# Altium PCB Pressure_Tap_Board.PcbDoc (part 1 of 2)
Units mil, origin at the board's own origin, x right, y up, seen from the top; angles counter-clockwise.
Board outline 8600 x 2865 mil, 2 copper layers (Top Layer, Bottom Layer); 161 components, 82 nets, 571 pads, 255 vias.
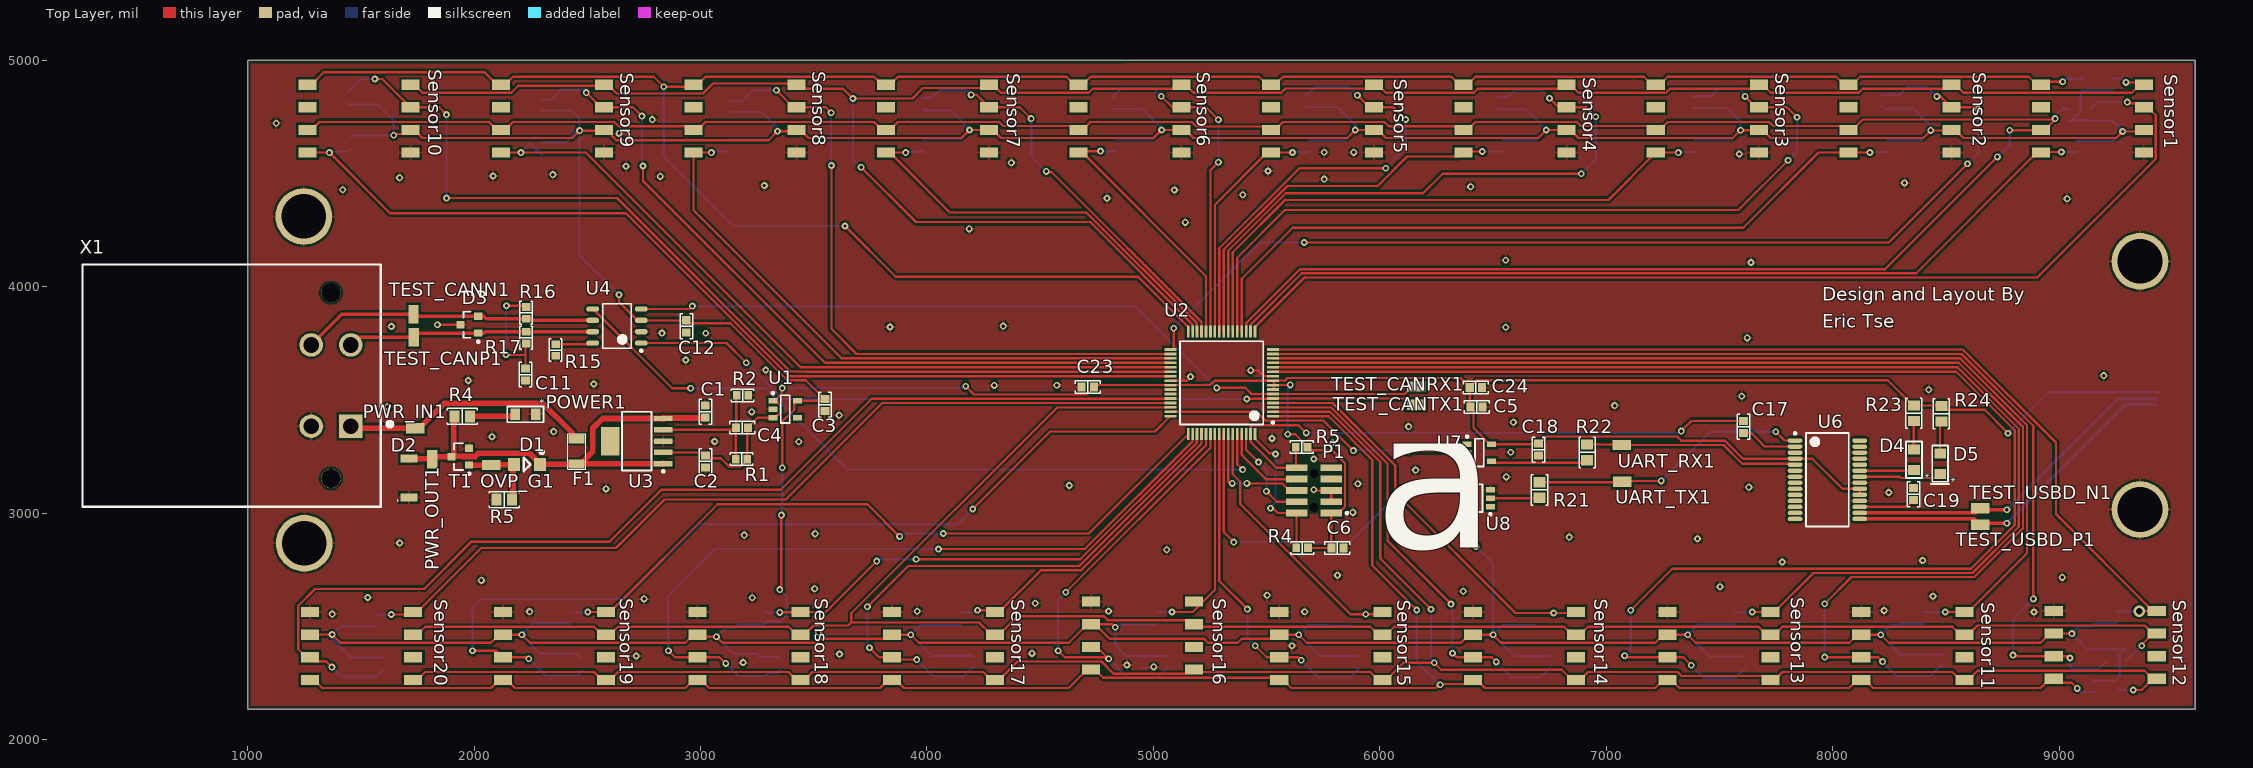
[diagram p0: Top Layer view]
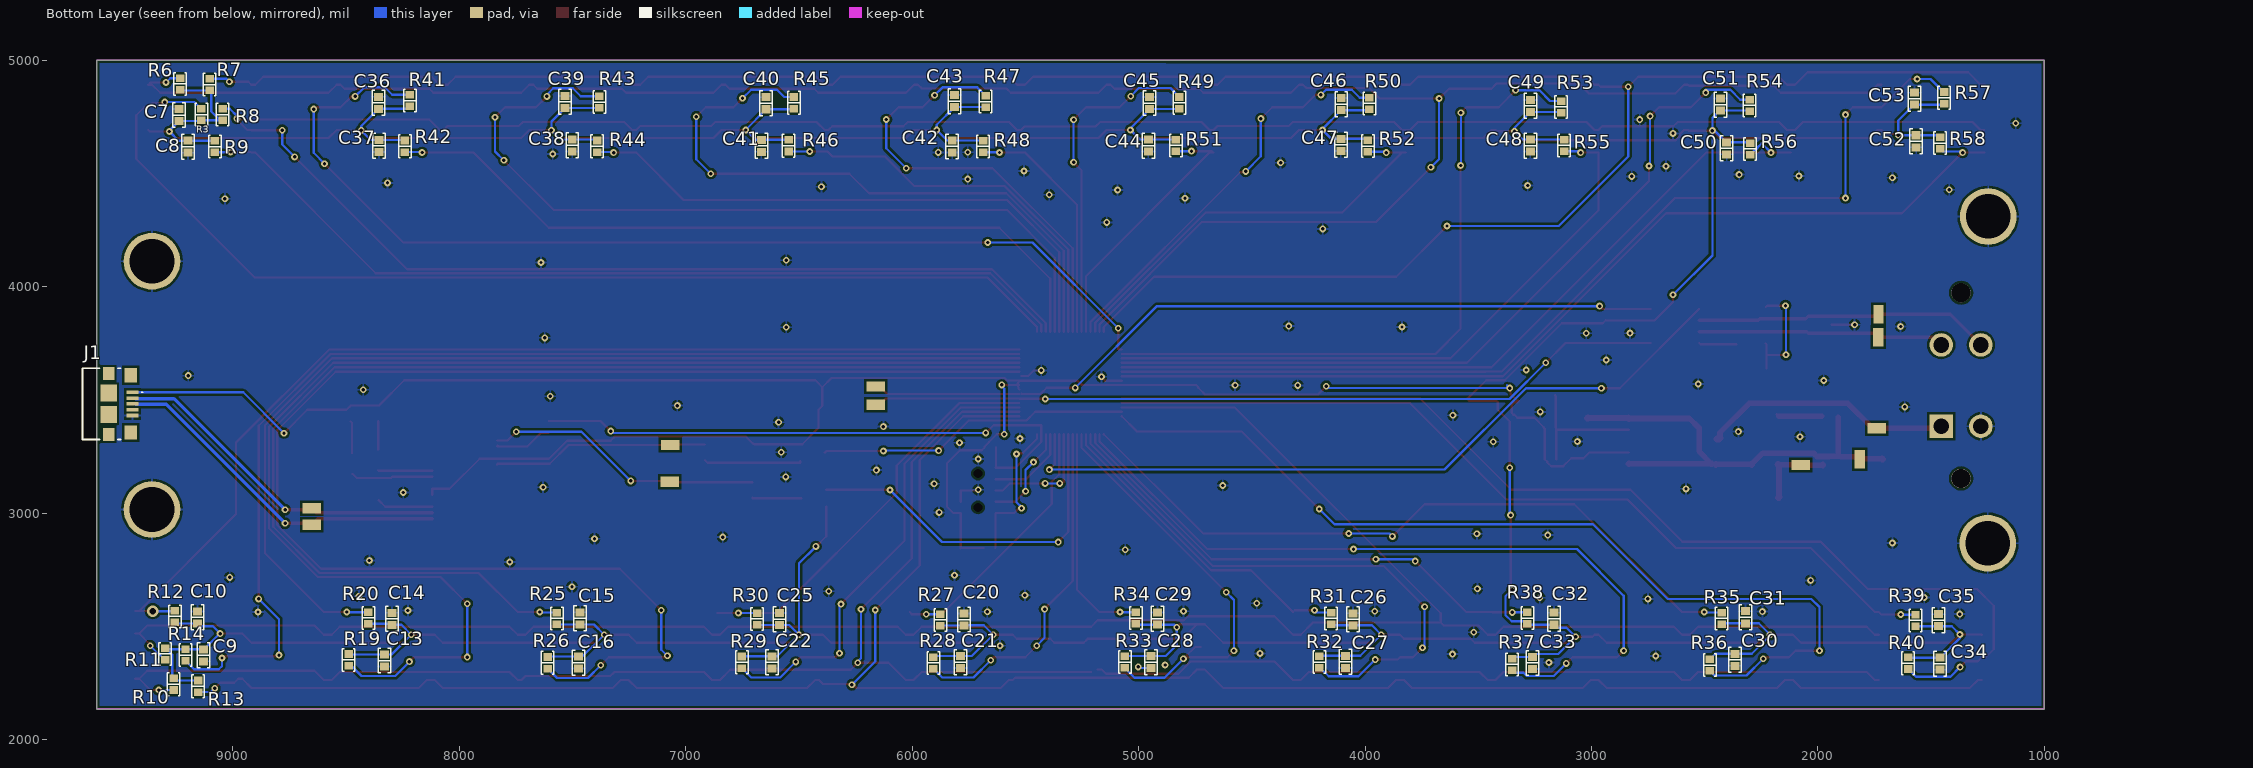
[diagram p1: Bottom Layer view, seen from below]
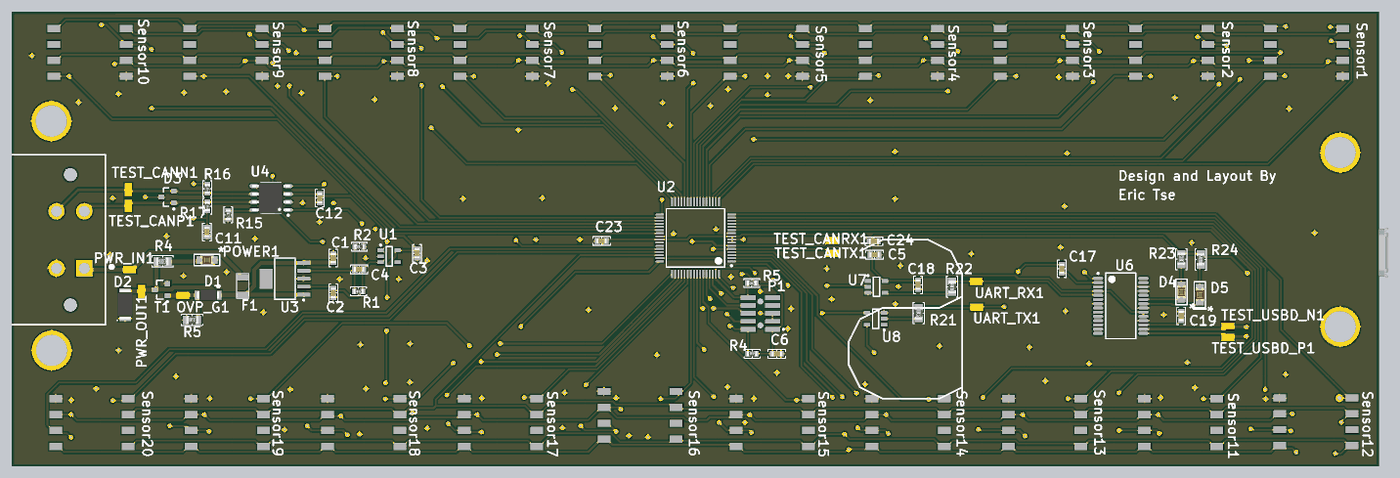
[diagram p3: 3D render of the assembled board from above, using the file's embedded part models]
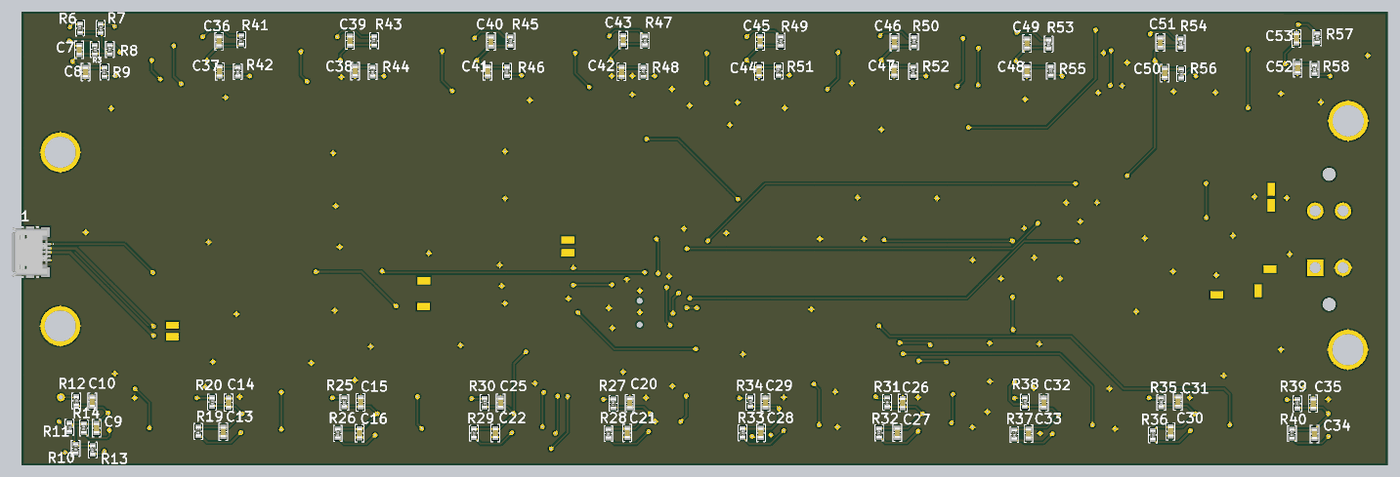
[diagram p4: 3D render of the assembled board from below, using the file's embedded part models]

## Layer stack, top to bottom
Top Solder: solder mask 0.4, Solder Resist, Dk 3.5
Top Layer: signal copper 1.4
Dielectric 1: dielectric 12.6, FR-4, Dk 4.8
Bottom Layer: signal copper 1.4
Bottom Solder: solder mask 0.4, Solder Resist, Dk 3.5

## Board outline
1000,2135 9600,2135 9600,5000 1000,5000

## Design rules (kind name [scope] priority, off if disabled: settings)
BoardOutlineClearance [All] p1: gap=10 ignorepadtopadclearanceinfootprint=FALSE
Clearance [All] p1: gap=10 ignorepadtopadclearanceinfootprint=FALSE except(8: Arc-Arc Arc-Track Arc-SMDPad Arc-Hole Track-Track Track-SMDPad Track-Hole SMDPad-SMDPad SMDPad-Hole THPad-Hole Via-Hole Fill-Hole Poly-Hole Region-Hole Text-Hole)
DiffPairsRouting [All] p1: maxlimit=20 minlimit=10 mostfreqgap=10 toplayer_minwidth=15 toplayer_maxwidth=15 toplayer_prefwidth=15 bottomlayer_minwidth=15 bottomlayer_maxwidth=15 bottomlayer_prefwidth=15 maxuncoupledlength=500
MatchedLengths "Schematic Matched Net Lengths" [InNet('D_N')] p1: tolerance=10 checknetsindiffpair=FALSE checkdiffpairvsdiffpair=TRUE checkxsignals=TRUE checkothers=TRUE
PolygonConnect [All] p1: connectstyle=Relief reliefconductorwidth=10 reliefentries=4 polygonreliefangle="90 Angle" airgapwidth=10
RoomDefinition U_USB [InComponentClass('U_USB')] p1: confinementstyle=ConfineIn formatcopy=TRUE lockcomponents=FALSE outline 0,0 2000,0 2000,1000 0,1000
RoomDefinition U_Sensors11-20 [InComponentClass('U_Sensors11-20')] p2: confinementstyle=ConfineIn formatcopy=TRUE lockcomponents=FALSE outline 0,0 2000,0 2000,1000 0,1000
RoomDefinition U_Sensors1-10 [InComponentClass('U_Sensors1-10')] p3: confinementstyle=ConfineIn formatcopy=TRUE lockcomponents=FALSE outline 0,0 2000,0 2000,1000 0,1000
RoomDefinition U_RVP_OVP_LC [InComponentClass('U_RVP_OVP_LC')] p4: confinementstyle=ConfineIn formatcopy=TRUE lockcomponents=FALSE outline 0,0 2000,0 2000,1000 0,1000
RoomDefinition "U_Power circuit" [InComponentClass('U_Power circuit')] p5: confinementstyle=ConfineIn formatcopy=TRUE lockcomponents=FALSE outline 0,0 2000,0 2000,1000 0,1000
RoomDefinition U_MCU_MKE185F512VLH16 [InComponentClass('U_MCU_MKE185F512VLH16')] p6: confinementstyle=ConfineIn formatcopy=TRUE lockcomponents=FALSE outline 0,0 2000,0 2000,1000 0,1000
RoomDefinition U_1 [InComponentClass('U_3')] p7: confinementstyle=ConfineIn formatcopy=TRUE lockcomponents=FALSE outline 0,0 2000,0 2000,1000 0,1000
RoomDefinition U_3 [InComponentClass('U_3')] p8: confinementstyle=ConfineIn formatcopy=TRUE lockcomponents=FALSE outline 0,0 2000,0 2000,1000 0,1000
RoomDefinition AeroPressureSensor [InComponentClass('AeroPressureSensor')] p9: confinementstyle=ConfineIn formatcopy=TRUE lockcomponents=FALSE outline 0,0 2000,0 2000,1000 0,1000
RoutingVias [All] p1: holewidth=28 width=50 viastyle="Through Hole" minholewidth=28 minwidth=50 maxholewidth=28 maxwidth=50
SolderMaskExpansion [All] p1: expansion=4
Width [All] p1: maxlimit=50 minlimit=10 preferedwidth=10 checkconnectedcopper=TRUE
29 further rules are at their usual default settings.

## Classes and differential pairs
component class U_USB: C17 C18 C19 D4 D5 J1 R21 R22 R23 R24 TEST_USBD_N1 TEST_USBD_P1 U6 UART_RX1 UART_TX1
component class U_Sensors11-20: C9 C10 C13 C14 C15 C16 C20 C21 C22 C25 C26 C27 C28 C29 C30 C31 C32 C33 C34 C35 R10 R11 R12 R13 R14 R19 R20 R25 R26 R27 R28 R29 R30 R31 R32 R33 R34 R35 R36 R37 R38 R39 R40 Sensor11 Sensor12 Sensor13 Sensor14 Sensor15 Sensor16 Sensor17 Sensor18 Sensor19 Sensor20
component class U_Sensors1-10: C7 C8 C36 C37 C38 C39 C40 C41 C42 C43 C44 C45 C46 C47 C48 C49 C50 C51 C52 C53 l R3 R6 R7 R8 R9 R41 R42 R43 R44 R45 R46 R47 R48 R49 R50 R51 R52 R53 R54 R55 R56 R57 R58 Sensor1 Sensor2 Sensor3 Sensor4 Sensor5 Sensor6 Sensor7 Sensor8 Sensor9 Sensor10
component class U_RVP_OVP_LC: D1 D2 OVP_G1 POWER1 PWR_IN1 PWR_OUT1 R4 R5 T1
component class "U_Power circuit": C1 C2 C3 C4 R1 R2 U1 U3
component class U_MCU_MKE185F512VLH16: C5 C6 C23 C24 P1 R4 R5 TEST_CANRX1 TEST_CANTX1 U2
component class U_3: C11 C12 D3 R15 R16 R17 TEST_CANN1 TEST_CANP1 U4
component class AeroPressureSensor: F1 X1
differential pair CAN: +CAN_P -CAN_N
differential pair D: +D_P -D_N

## Components (designator, comment, footprint, x,y, rotation, side; value= is the part's Value field where it differs from the comment)
C1 "Capacitor MLCC 0.10uf 16V CAP 0603/1608" "CAP 0603/1608" 3021,3449 r270 top value=0.10uf
C2 "Capacitor MLCC 1.0uf 16V CAP 0603/1608" "CAP 0603/1608" 3022,3229.57 r90 top value=1.0uf
C3 "Capacitor MLCC 1.0uf 16V CAP 0603/1608" "CAP 0603/1608" 3549,3479 r90 top value=1.0uf
C4 "Capacitor MLCC 0.010uf 16V CAP 0603/1608" "CAP 0603/1608" 3184,3378 r0 top value=0.010uf
C5 "Capacitor MLCC 0.10uf 25V CAP 0603/1608" "CAP 0603/1608" 6427.43,3470 r180 top value=0.10uf
C6 "Capacitor MLCC 0.10uf 16V CAP 0603/1608" "CAP 0603/1608" 5812.35,2846.23 r180 top value=0.10uf
C7 "Capacitor MLCC 0.10uf 16V CAP 0603/1608" "CAP 0603/1608" 9238,4759 r270 bottom value=0.10uf
C8 "Capacitor MLCC 10uf 16V CAP 0603/1608" "CAP 0603/1608" 9198,4619 r90 bottom value=10uf
C9 "Capacitor MLCC 0.10uf 16V CAP 0603/1608" "CAP 0603/1608" 9129,2373 r90 bottom value=0.10uf
C10 "Capacitor MLCC 10uf 16V CAP 0603/1608" "CAP 0603/1608" 9156,2540 r270 bottom value=10uf
C11 "Capacitor MLCC 4700pf 50V CAP 0603/1608" "CAP 0603/1608" 2227,3613 r90 top value=4700pf
C12 "Capacitor MLCC 0.10uf 50V CAP 0603/1608" "CAP 0603/1608" 2937,3826 r270 top value=0.10uf
C13 "Capacitor MLCC 10uf 16V CAP 0603/1608" "CAP 0603/1608" 8331,2350 r90 bottom value=10uf
C14 "Capacitor MLCC 0.10uf 16V CAP 0603/1608" "CAP 0603/1608" 8297,2534 r270 bottom value=0.10uf
C15 "Capacitor MLCC 0.10uf 16V CAP 0603/1608" "CAP 0603/1608" 7466,2536 r270 bottom value=0.10uf
C16 "Capacitor MLCC 10uf 16V CAP 0603/1608" "CAP 0603/1608" 7473,2341 r90 bottom value=10uf
C17 "Capacitor MLCC 0.10uf 25V CAP 0603/1608" "CAP 0603/1608" 7606,3381.57 r90 top value=0.10uf
C18 "Capacitor MLCC 0.10uf 25V CAP 0603/1608" "CAP 0603/1608" 6701,3281 r90 top value=0.10uf
C19 "Capacitor MLCC 0.10uf 25V CAP 0603/1608" "CAP 0603/1608" 8357,3085 r270 top value=0.10uf
C20 "Capacitor MLCC 0.10uf 16V CAP 0603/1608" "CAP 0603/1608" 5771,2531 r270 bottom value=0.10uf
C21 "Capacitor MLCC 10uf 16V CAP 0603/1608" "CAP 0603/1608" 5787,2343 r90 bottom value=10uf
C22 "Capacitor MLCC 0.10uf 16V CAP 0603/1608" "CAP 0603/1608" 6618,2342 r90 bottom value=0.10uf
C23 "Capacitor MLCC 100pf 25V CAP 0603/1608" "CAP 0603/1608" 4710,3557 r0 top value=100pf
C24 "Capacitor MLCC 0.10uf 25V CAP 0603/1608" "CAP 0603/1608" 6423.57,3555 r180 top value=0.10uf
C25 "Capacitor MLCC 10uf 16V CAP 0603/1608" "CAP 0603/1608" 6585,2533 r270 bottom value=10uf
C26 "Capacitor MLCC 0.10uf 16V CAP 0603/1608" "CAP 0603/1608" 4053,2532 r270 bottom value=0.10uf
C27 "Capacitor MLCC 10uf 16V CAP 0603/1608" "CAP 0603/1608" 4087,2344 r90 bottom value=10uf
C28 "Capacitor MLCC 0.10uf 16V CAP 0603/1608" "CAP 0603/1608" 4946,2343 r90 bottom value=0.10uf
C29 "Capacitor MLCC 10uf 16V CAP 0603/1608" "CAP 0603/1608" 4917,2535 r270 bottom value=10uf
C30 "Capacitor MLCC 0.10uf 16V CAP 0603/1608" "CAP 0603/1608" 2366,2353 r90 bottom value=0.10uf
C31 "Capacitor MLCC 10uf 16V CAP 0603/1608" "CAP 0603/1608" 2320,2541 r270 bottom value=10uf
C32 "Capacitor MLCC 10uf 16V CAP 0603/1608" "CAP 0603/1608" 3165,2534.43 r270 bottom value=10uf
C33 "Capacitor MLCC 0.10uf 16V CAP 0603/1608" "CAP 0603/1608" 3261,2339 r90 bottom value=0.10uf
C34 "Capacitor MLCC 0.10uf 16V CAP 0603/1608" "CAP 0603/1608" 1460,2336 r90 bottom value=0.10uf
C35 "Capacitor MLCC 10uf 16V CAP 0603/1608" "CAP 0603/1608" 1468,2528 r270 bottom value=10uf
C36 "Capacitor MLCC 0.10uf 16V CAP 0603/1608" "CAP 0603/1608" 8357,4813 r270 bottom value=0.10uf
C37 "Capacitor MLCC 10uf 16V CAP 0603/1608" "CAP 0603/1608" 8354,4622.43 r90 bottom value=10uf
C38 "Capacitor MLCC 0.10uf 16V CAP 0603/1608" "CAP 0603/1608" 7501,4624.43 r90 bottom value=0.10uf
C39 "Capacitor MLCC 10uf 16V CAP 0603/1608" "CAP 0603/1608" 7533,4816.57 r270 bottom value=10uf
C40 "Capacitor MLCC 0.10uf 16V CAP 0603/1608" "CAP 0603/1608" 6645,4811 r270 bottom value=0.10uf
C41 "Capacitor MLCC 10uf 16V CAP 0603/1608" "CAP 0603/1608" 6666,4623 r90 bottom value=10uf
C42 "Capacitor MLCC 0.10uf 16V CAP 0603/1608" "CAP 0603/1608" 5823,4620 r90 bottom value=0.10uf
C43 "Capacitor MLCC 10uf 16V CAP 0603/1608" "CAP 0603/1608" 5813,4820.59 r270 bottom value=10uf
C44 "Capacitor MLCC 0.10uf 16V CAP 0603/1608" "CAP 0603/1608" 4957,4624 r90 bottom value=0.10uf
C45 "Capacitor MLCC 10uf 16V CAP 0603/1608" "CAP 0603/1608" 4951,4812 r270 bottom value=10uf
C46 "Capacitor MLCC 0.10uf 16V CAP 0603/1608" "CAP 0603/1608" 4105,4807 r270 bottom value=0.10uf
C47 "Capacitor MLCC 10uf 16V CAP 0603/1608" "CAP 0603/1608" 4107,4627 r90 bottom value=10uf
C48 "Capacitor MLCC 0.10uf 16V CAP 0603/1608" "CAP 0603/1608" 3270,4624 r90 bottom value=0.10uf
C49 "Capacitor MLCC 10uf 16V CAP 0603/1608" "CAP 0603/1608" 3270,4799 r270 bottom value=10uf
C50 "Capacitor MLCC 0.10uf 16V CAP 0603/1608" "CAP 0603/1608" 2403,4612 r90 bottom value=0.10uf
C51 "Capacitor MLCC 10uf 16V CAP 0603/1608" "CAP 0603/1608" 2431,4805 r270 bottom value=10uf
C52 "Capacitor MLCC 0.10uf 16V CAP 0603/1608" "CAP 0603/1608" 1566,4643 r90 bottom value=0.10uf
C53 "Capacitor MLCC 10uf 16V CAP 0603/1608" "CAP 0603/1608" 1574,4831 r270 bottom value=10uf
D1 "DDZ9701-7" SOD123F 2234,3216 r0 top value=14Vz
D2 "DIODE" SOD-128 1712,3156 r90 top value=5A
D3 "NUP1105LT1G" "SOT-23 (TO-236)" 1979,3833 r180 top value=TVS_24V
D4 "" 0805_LED 8359,3236 r270 top value=Green
D5 "" 0805_LED 8474,3219 r270 top value=Red
F1 "2.2A" "PTC Fuse 1206/3216" 2453,3273 r90 top
J1 "1981568-1" TECO-1981568-5_V 9442.68,3483.24 r270 bottom value=CONN
OVP_G1 "RCU-0C" RCU-0C 2076,3213 r90 top
P1 "5103309-1" HDR2X5_SMT 5709,3101 r90 top value=CONN
POWER1 "LED" 0805_LED 2227,3437 r0 top value=Green
PWR_IN1 "RCU-0C" RCU-0C 1740.6,3376 r90 top
PWR_OUT1 "RCU-0C" RCU-0C 1815,3239 r180 top
R1 "Resistor 43k 0603 1/10W 1%" "RES 0603/1608" 3181,3239 r0 top value=43k
R2 "Resistor 15k 0603 1/10W 1%" "RES 0603/1608" 3186,3521 r180 top value=15k
R3 "Resistor 1.0k 0603 1/10W 5%" "RES 0603/1608" 9139,4761 r270 bottom value=1.0k
R4 "Resistor 470 0805 1/10W 1%" "RES 0805/2012" 1948,3428 r180 top value=470
R4 "Resistor 10k 0603 1/10W 1%" "RES 0603/1608" 5657,2847 r0 top value=10k
R5 "Resistor 47k 0805 1/10W 1%" "RES 0805/2012" 2133,3060 r0 top value=47k
R5 "Resistor 10k 0603 1/10W 5%" "RES 0603/1608" 5655,3292 r0 top value=10k
R6 "Resistor 1.0k 0603 1/10W 5%" "RES 0603/1608" 9233,4896 r270 bottom value=1.0k
R7 "Resistor 1.0k 0603 1/10W 5%" "RES 0603/1608" 9102,4893 r270 bottom value=1.0k
R8 "Resistor 1.0k 0603 1/10W 5%" "RES 0603/1608" 9045,4761 r270 bottom value=1.0k
R9 "Resistor 1.0k 0603 1/10W 5%" "RES 0603/1608" 9079,4619.59 r90 bottom value=1.0k
R10 "Resistor 1.0k 0603 1/10W 5%" "RES 0603/1608" 9261,2245.41 r90 bottom value=1.0k
R11 "Resistor 1.0k 0603 1/10W 5%" "RES 0603/1608" 9299,2379 r90 bottom value=1.0k
R12 "Resistor 1.0k 0603 1/10W 5%" "RES 0603/1608" 9256,2545 r270 bottom value=1.0k
R13 "Resistor 1.0k 0603 1/10W 5%" "RES 0603/1608" 9153,2236 r90 bottom value=1.0k
R14 "Resistor 1.0k 0603 1/10W 5%" "RES 0603/1608" 9209,2374 r90 bottom value=1.0k
R15 "Resistor 1.0k 0603 1/10W 1%" "RES 0603/1608" 2360,3721 r270 top value=1.0k
R16 "Resistor 62 0603 1/10W 5%" "RES 0603/1608" 2230,3885.59 r90 top value=62
R17 "Resistor 62 0603 1/10W 5%" "RES 0603/1608" 2230,3775.41 r90 top value=62
R19 "Resistor 1.0k 0603 1/10W 5%" "RES 0603/1608" 8489,2353 r90 bottom value=1.0k
R20 "Resistor 1.0k 0603 1/10W 5%" "RES 0603/1608" 8401,2538 r270 bottom value=1.0k
R21 "Resistor 1.0k 0805 1/4W 1%" "RES 0805/2012" 6705,3103 r270 top value=1.0k
R22 "Resistor 1.0k 0805 1/4W 1%" "RES 0805/2012" 6915,3269 r270 top value=1.0k
R23 "Resistor 1.0k 0805 1/4W 1%" "RES 0805/2012" 8358,3442 r90 top value=1.0k
R24 "Resistor 1.0k 0805 1/4W 1%" "RES 0805/2012" 8480,3440 r90 top value=1.0k
R25 "Resistor 1.0k 0603 1/10W 5%" "RES 0603/1608" 7569,2536 r270 bottom value=1.0k
R26 "Resistor 1.0k 0603 1/10W 5%" "RES 0603/1608" 7610,2340 r90 bottom value=1.0k
R27 "Resistor 1.0k 0603 1/10W 5%" "RES 0603/1608" 5875,2529 r270 bottom value=1.0k
R28 "Resistor 1.0k 0603 1/10W 5%" "RES 0603/1608" 5906,2339 r90 bottom value=1.0k
R29 "Resistor 1.0k 0603 1/10W 5%" "RES 0603/1608" 6752,2342 r90 bottom value=1.0k
R30 "Resistor 1.0k 0603 1/10W 5%" "RES 0603/1608" 6685,2534 r270 bottom value=1.0k
R31 "Resistor 1.0k 0603 1/10W 5%" "RES 0603/1608" 4150,2536 r270 bottom value=1.0k
R32 "Resistor 1.0k 0603 1/10W 5%" "RES 0603/1608" 4202,2343 r90 bottom value=1.0k
R33 "Resistor 1.0k 0603 1/10W 5%" "RES 0603/1608" 5061,2343 r90 bottom value=1.0k
R34 "Resistor 1.0k 0603 1/10W 5%" "RES 0603/1608" 5012,2537 r270 bottom value=1.0k
R35 "Resistor 1.0k 0603 1/10W 5%" "RES 0603/1608" 2425,2536 r270 bottom value=1.0k
R36 "Resistor 1.0k 0603 1/10W 5%" "RES 0603/1608" 2477,2330 r90 bottom value=1.0k
R37 "Resistor 1.0k 0603 1/10W 5%" "RES 0603/1608" 3350,2333 r90 bottom value=1.0k
R38 "Resistor 1.0k 0603 1/10W 5%" "RES 0603/1608" 3283,2537 r270 bottom value=1.0k
R39 "Resistor 1.0k 0603 1/10W 5%" "RES 0603/1608" 1569,2527 r270 bottom value=1.0k
R40 "Resistor 1.0k 0603 1/10W 5%" "RES 0603/1608" 1602,2338 r90 bottom value=1.0k
R41 "Resistor 1.0k 0603 1/10W 5%" "RES 0603/1608" 8218,4823 r270 bottom value=1.0k
R42 "Resistor 1.0k 0603 1/10W 5%" "RES 0603/1608" 8240,4621 r90 bottom value=1.0k
R43 "Resistor 1.0k 0603 1/10W 5%" "RES 0603/1608" 7381,4816 r270 bottom value=1.0k
R44 "Resistor 1.0k 0603 1/10W 5%" "RES 0603/1608" 7391,4621 r90 bottom value=1.0k
R45 "Resistor 1.0k 0603 1/10W 5%" "RES 0603/1608" 6522,4813 r270 bottom value=1.0k
R46 "Resistor 1.0k 0603 1/10W 5%" "RES 0603/1608" 6545,4623.41 r90 bottom value=1.0k
R47 "Resistor 1.0k 0603 1/10W 5%" "RES 0603/1608" 5675,4818 r270 bottom value=1.0k
R48 "Resistor 1.0k 0603 1/10W 5%" "RES 0603/1608" 5687,4620.41 r90 bottom value=1.0k
R49 "Resistor 1.0k 0603 1/10W 5%" "RES 0603/1608" 4820,4813 r270 bottom value=1.0k
R50 "Resistor 1.0k 0603 1/10W 5%" "RES 0603/1608" 3981,4810 r270 bottom value=1.0k
R51 "Resistor 1.0k 0603 1/10W 5%" "RES 0603/1608" 4835,4625 r90 bottom value=1.0k
R52 "Resistor 1.0k 0603 1/10W 5%" "RES 0603/1608" 3987,4622 r90 bottom value=1.0k
R53 "Resistor 1.0k 0603 1/10W 5%" "RES 0603/1608" 3134,4795 r270 bottom value=1.0k
R54 "Resistor 1.0k 0603 1/10W 5%" "RES 0603/1608" 2302,4801 r270 bottom value=1.0k
R55 "Resistor 1.0k 0603 1/10W 5%" "RES 0603/1608" 3121,4625 r90 bottom value=1.0k
R56 "Resistor 1.0k 0603 1/10W 5%" "RES 0603/1608" 2299,4609 r90 bottom value=1.0k
R57 "Resistor 1.0k 0603 1/10W 5%" "RES 0603/1608" 1443,4835 r270 bottom value=1.0k
R58 "Resistor 1.0k 0603 1/10W 5%" "RES 0603/1608" 1460,4635 r90 bottom value=1.0k
Sensor1 "for Aero Pressure Sensor Board" "RSCMJJM005NDSE3 Pressure Sensor" 8923.92,4793 r270 top
Sensor2 "for Aero Pressure Sensor Board" "RSCMJJM005NDSE3 Pressure Sensor" 8073.92,4793 r270 top
Sensor3 "for Aero Pressure Sensor Board" "RSCMJJM005NDSE3 Pressure Sensor" 7223.45,4793 r270 top
Sensor4 "for Aero Pressure Sensor Board" "RSCMJJM005NDSE3 Pressure Sensor" 6373.92,4793 r270 top
Sensor5 "for Aero Pressure Sensor Board" "RSCMJJM005NDSE3 Pressure Sensor" 5523.92,4793 r270 top
Sensor6 "for Aero Pressure Sensor Board" "RSCMJJM005NDSE3 Pressure Sensor" 4673.92,4793 r270 top
Sensor7 "for Aero Pressure Sensor Board" "RSCMJJM005NDSE3 Pressure Sensor" 3823.92,4793 r270 top
Sensor8 "for Aero Pressure Sensor Board" "RSCMJJM005NDSE3 Pressure Sensor" 2973.92,4793 r270 top
Sensor9 "for Aero Pressure Sensor Board" "RSCMJJM005NDSE3 Pressure Sensor" 2123.92,4793 r270 top
Sensor10 "for Aero Pressure Sensor Board" "RSCMJJM005NDSE3 Pressure Sensor" 1268.92,4793 r270 top
Sensor11 "for Aero Pressure Sensor Board" "RSCMJJM005NDSE3 Pressure Sensor" 8576.08,2364 r90 top
Sensor12 "for Aero Pressure Sensor Board" "RSCMJJM005NDSE3 Pressure Sensor" 9426.08,2369 r90 top
Sensor13 "for Aero Pressure Sensor Board" "RSCMJJM005NDSE3 Pressure Sensor" 7719.68,2364 r90 top
Sensor14 "for Aero Pressure Sensor Board" "RSCMJJM005NDSE3 Pressure Sensor" 6861,2364 r90 top
Sensor15 "for Aero Pressure Sensor Board" "RSCMJJM005NDSE3 Pressure Sensor" 6006,2364 r90 top
Sensor16 "for Aero Pressure Sensor Board" "RSCMJJM005NDSE3 Pressure Sensor" 5175,2410 r90 top
Sensor17 "for Aero Pressure Sensor Board" "RSCMJJM005NDSE3 Pressure Sensor" 4296,2364 r90 top
Sensor18 "for Aero Pressure Sensor Board" "RSCMJJM005NDSE3 Pressure Sensor" 3436,2364 r90 top
Sensor19 "for Aero Pressure Sensor Board" "RSCMJJM005NDSE3 Pressure Sensor" 2577.57,2364 r90 top
Sensor20 "for Aero Pressure Sensor Board" "RSCMJJM005NDSE3 Pressure Sensor" 1726,2364 r90 top
T1 "DMG2302UK-7" SOT23-3 1939,3250 r180 top value=N_Channel
TEST_CANN1 "RCU-0C" RCU-0C 1732,3879 r0 top
TEST_CANP1 "RCU-0C" RCU-0C 1733,3778 r180 top
TEST_CANRX1 "RCU-0C" RCU-0C 6161,3560 r90 top
TEST_CANTX1 "RCU-0C" RCU-0C 6161,3479 r90 top
TEST_USBD_N1 "RCU-0C" RCU-0C 8651,3022 r90 top
TEST_USBD_P1 "RCU-0C" RCU-0C 8651,2950 r90 top
U1 "LP5907-3.3 V LDO" SOT23-5 3374,3460 r0 top value="3.3 V"
U2 "" TQFP64 5301,3576 r180 top
U3 "LDO-5Pin" SOT223-5 2718,3319 r180 top value="5.5V 1A"
U4 "SN65HVD233 3.3V CAN Bus Transceivers" SOIC-8 2631,3827 r180 top value="CAN to UART"
U6 "FT232RL" SSOP-28 7976.28,3148.31 r0 top
U7 "SN74LV1T34 Logic Level Shifter" SOT23-5 6439.5,3268.07 r0 top value=N/A
U8 "SN74LV1T34 Logic Level Shifter" SOT23-5 6434,3067 r180 top value=N/A
UART_RX1 "RCU-0C" RCU-0C 7068,3302 r90 top
UART_TX1 "RCU-0C" RCU-0C 7071,3139 r90 top
X1 "DTF13-4P" DTF13-4P 1368,3563.96 r270 top value=CONN

## Footprints (in the part's own frame and the unit in brackets; to place one, negate y for a bottom-side part, rotate by r counter-clockwise, add the part's x,y. Pads: shape width x height; smd on the part's side, far side on the other; paste and mask are expansions set on the pad)
0805_LED [mm]
  rect 1.1x1.3 smd: 1(-1.15,0) 2(1.15,0)
  silkscreen extent -2.06,-0.89 2.03,0.89, body extent -1.05,-0.67 1.05,0.68, height 0.9
"CAP 0603/1608" [mm] "Chip Capacitor, 2-Leads, Body 1.60x0.80mm, IPC Medium Density"
  rect 0.9x1 smd: 1(-0.675,0) 2(0.675,0)
  silkscreen extent -1.4,-0.7 1.4,0.7, body extent -0.8,-0.41 0.8,0.41, height 0.82
DTF13-4P [mm]
  rect 2.64x2.64 hole 1.76: 1(4.561,2.223)
  round 2.64 hole 1.76: 2(4.561,-2.227) 3(-4.559,-2.227) 4(-4.559,2.223)
  round 2.16 hole 2.16 unplated: None(-10.415,0) None(10.415,0)
  silkscreen extent -13.59,-27.88 13.59,6.85
HDR2X5_SMT [mm] "Header, 10-Leads, Body 3.43x6.35mm, Pitch 1.27mm"
  rect 0.76x2.4 smd: 1(-2.54,-1.95) 2(-2.54,1.95) 3(-1.27,-1.95) 4(-1.27,1.95) 5(0,-1.95) 6(0,1.95) 7(1.27,-1.95) 8(1.27,1.95) 9(2.54,-1.95) 10(2.54,1.95)
  round 0 hole 1 unplated: MH1(-1.905,0) MH2(1.905,0)
  silkscreen extent -2.66,-3.83 -2.42,-3.58, body extent -3.17,-1.72 3.17,1.72, height 4.55
"PTC Fuse 1206/3216" [mm]
  rect 1x1.8 smd: 1(-1.4,0) 2(1.4,0)
  silkscreen extent -2,-1 2,1, body extent -1.75,-1 1.75,1, height 1
RCU-0C [mm]
  rect 1.15x2.05 all layers, no hole: 1(0,0)
"RES 0603/1608" [mm] "Chip Resistor, 2-Leads, Body 1.60x0.80mm, IPC Medium Density"
  rect 0.85x0.95 smd: 1(-0.65,0) 2(0.65,0)
  silkscreen extent -1.27,-0.7 1.27,0.7, body extent -0.8,-0.4 0.8,0.4, height 0.45
"RES 0805/2012" [mm] "Chip Resistor, 2-Leads, Body 2.00x1.25mm, IPC Medium Density"
  rect 1.15x1.35 smd: 1(-0.875,0) 2(0.875,0)
  silkscreen extent -1.7,-0.9 1.7,0.9, body extent -0.95,-0.62 1.05,0.63, height 0.6
"RSCMJJM005NDSE3 Pressure Sensor" [mil]
  rect 45x80 smd: 1(-100,-5) 2(0,-5) 3(100,-5) 4(200,-5) 5(200,450.08) 6(100,450.08) 7(0,450.08) 8(-100,450.08)
  body extent -433,0 236,472, height 331
SOD123F [mm] "SODFL, 2-Leads, Body 1.80x3.50mm, IPC Low Density"
  rect 1.35x1.45 smd: 1(-1.475,0) 2(1.475,0)
  silkscreen extent -0.38,-0.76 1.75,1.5, body extent -1.75,-0.95 1.75,0.95, height 1.15
SOD-128 [mm] "SOD-128, 2-Leads, Body 2.40x4.70mm, IPC Medium Density"
  rect 0.9x1.9 smd: 1(-2.175,0) 2(2.175,0)
  silkscreen extent -2.57,1.2 -2.48,1.3, body extent -2.35,-1.25 2.35,1.25, height 0.85
SOIC-8 [mm] "SOIC, 8-Leads, Body 4.90x3.90mm, Pitch 1.27mm, IPC Medium Density"
  oval 1.45x0.6 smd: 1(-2.725,1.905) 2(-2.725,0.635) 3(-2.725,-0.635) 4(-2.725,-1.905) 5(2.725,-1.905) 6(2.725,-0.635) 7(2.725,0.635) 8(2.725,1.905)
  silkscreen extent -2.85,-2.5 1.6,2.88, body extent -3,-2.5 3,2.5, height 1.75
SOT23-3 [mm] "SOT23, 3-Leads, Body 2.92x2.37mm, Pitch 0.95mm, IPC Medium Density, NUP2105L"
  rect 0.9x0.8 smd: 1(-1,0.95) 2(-1,-0.95) 3(1,0)
  silkscreen extent -1.13,-1.5 0.7,2.02, body extent -0.7,-1.52 0.7,1.52, height 1.11
SOT23-5 [mm] "SOT23, 5-Leads, Body 2.90x2.80mm, Pitch 0.95mm, IPC Medium Density, LP5907-3.3"
  rect 1x0.6 smd: 1(-1.375,0.95) 2(-1.375,0) 3(-1.375,-0.95) 4(1.375,-0.95) 5(1.375,0.95)
  silkscreen extent -1.5,-1.55 0.5,1.92, body extent -0.88,-1.52 0.87,1.53, height 1.45
SOT223-5 [mm] "SOT223-5 TPS7A45 Low-dropout regulator"
  rect 2.1x0.6 smd: 1(-2.975,2.54) 2(-2.975,1.27) 3(-2.975,0) 4(-2.975,-1.27) 5(-2.975,-2.54)
  rect 2.1x3.2 smd: ""(2.975,0)
  silkscreen extent -3.1,-3.3 1.65,3.51, body extent -1.78,-3.27 1.78,3.27, height 1.8
"SOT-23 (TO-236)" [mm]
  rect 0.9x0.8 smd: 1(-1,0.95) 2(-1,-0.95) 3(1,0)
  silkscreen extent -1.13,-1.46 0.65,2.02, body extent -0.65,-1.46 0.65,1.46, height 1.11
SSOP-28 [mm] "SOP68P780X200-28N ,SOP, 28-Leads, Body 10.20x5.30mm, Pitch 0.68mm, IPC Medium Density, FT232RL"
  oval 1.65x0.5 smd: 1(-3.625,4.394) 2(-3.625,3.718) 3(-3.625,3.042) 4(-3.625,2.366) 5(-3.625,1.69) 6(-3.625,1.014) 7(-3.625,0.338) 8(-3.625,-0.338) 9(-3.625,-1.014) 10(-3.625,-1.69) 11(-3.625,-2.366) 12(-3.625,-3.042) 13(-3.625,-3.718) 14(-3.625,-4.394) 15(3.625,-4.394) 16(3.625,-3.718) 17(3.625,-3.042) 18(3.625,-2.366) 19(3.625,-1.69) 20(3.625,-1.014) 21(3.625,-0.338) 22(3.625,0.338) 23(3.625,1.014) 24(3.625,1.69) 25(3.625,2.366) 26(3.625,3.042) 27(3.625,3.718) 28(3.625,4.394)
  silkscreen extent -3.75,-5.25 2.4,5.32, body extent -2.8,-5.25 2.8,5.25, height 2
TECO-1981568-5_V [mm] "SMD, 5-Leads, Body 8x5.9mm, Pitch 0.65mm"
  rect 0.4x1.35 smd: 1(-1.3,0) 2(-0.65,0) 3(0,0) 4(0.65,0) 5(1.3,0)
  rect 1.6x1.4 smd: 6(-3.2,-0.225) 7(3.2,-0.225)
  rect 1.45x1.3 smd: 8(-3.425,-2.675) 9(3.425,-2.675)
  rect 1.9x1.9 smd: 10(-1.2,-2.675) 11(1.2,-2.675)
  silkscreen extent -4,-5.63 4,1.12, body extent -4,-5.5 4,0.1, height 2.79
TQFP64 [mm] "TSQFP, 64-Leads, Body 10.00x10.00mm, Pitch 0.50mm, IPC Medium Density, MKE18F512VLH16"
  rect 1.35x0.3 smd: 1(-5.75,3.75) 2(-5.75,3.25) 3(-5.75,2.75) 4(-5.75,2.25) 5(-5.75,1.75) 6(-5.75,1.25) 7(-5.75,0.75) 8(-5.75,0.25) 9(-5.75,-0.25) 10(-5.75,-0.75) 11(-5.75,-1.25) 12(-5.75,-1.75) 13(-5.75,-2.25) 14(-5.75,-2.75) 15(-5.75,-3.25) 16(-5.75,-3.75) 33(5.75,-3.75) 34(5.75,-3.25) 35(5.75,-2.75) 36(5.75,-2.25) 37(5.75,-1.75) 38(5.75,-1.25) 39(5.75,-0.75) 40(5.75,-0.25) 41(5.75,0.25) 42(5.75,0.75) 43(5.75,1.25) 44(5.75,1.75) 45(5.75,2.25) 46(5.75,2.75) 47(5.75,3.25) 48(5.75,3.75)
  rect 0.3x1.35 smd: 17(-3.75,-5.75) 18(-3.25,-5.75) 19(-2.75,-5.75) 20(-2.25,-5.75) 21(-1.75,-5.75) 22(-1.25,-5.75) 23(-0.75,-5.75) 24(-0.25,-5.75) 25(0.25,-5.75) 26(0.75,-5.75) 27(1.25,-5.75) 28(1.75,-5.75) 29(2.25,-5.75) 30(2.75,-5.75) 31(3.25,-5.75) 32(3.75,-5.75) 49(3.75,5.75) 50(3.25,5.75) 51(2.75,5.75) 52(2.25,5.75) 53(1.75,5.75) 54(1.25,5.75) 55(0.75,5.75) 56(0.25,5.75) 57(-0.25,5.75) 58(-0.75,5.75) 59(-1.25,5.75) 60(-1.75,5.75) 61(-2.25,5.75) 62(-2.75,5.75) 63(-3.25,5.75) 64(-3.75,5.75)
  silkscreen extent -5.88,-4.67 4.67,4.68, body extent -5,-5 5,5, height 1.6

## Part data
C1 C6 C7 C9 C14 C15 C20 C22 C26 C28 C30 C33 C34 C36 C38 C40 C42 C44 C46 C48 C50 C52: library part 223, Dielectric=Ceramic, Manufacturer_id=1, Package="CAP 0603/1608", Voltage_Rating=16V, Created_By="Nick Mah", Created_Date=10/20/2018, Drawer_id=1, idCapacitor=223, Name="Cap_0.10uf_16V_CAP 0603/1608"
C2 C3: library part 229, Dielectric=Ceramic, Manufacturer_id=1, Package="CAP 0603/1608", Voltage_Rating=16V, Created_By="Nick Mah", Created_Date=10/20/2018, Drawer_id=1, idCapacitor=229, Name="Cap_1.0uf_16V_CAP 0603/1608"
C4: library part 217, Dielectric=Ceramic, Manufacturer_id=1, Package="CAP 0603/1608", Voltage_Rating=16V, Created_By="Nick Mah", Created_Date=10/20/2018, Drawer_id=1, idCapacitor=217, Name="Cap_0.010uf_16V_CAP 0603/1608"
C5 C17 C18 C19 C24: library part 583, Dielectric=Ceramic, Manufacturer_id=1, Package="CAP 0603/1608", Voltage_Rating=25V, Created_By="Nick Mah", Created_Date=10/20/2018, Drawer_id=1, idCapacitor=583, Name="Cap_0.10uf_25V_CAP 0603/1608"
C8 C10 C13 C16 C21 C25 C27 C29 C31 C32 C35 C37 C39 C41 C43 C45 C47 C49 C51 C53: library part 235, Dielectric=Ceramic, Manufacturer_id=1, Package="CAP 0603/1608", Voltage_Rating=16V, Created_By="Nick Mah", Created_Date=10/20/2018, Drawer_id=1, idCapacitor=235, Name="Cap_10uf_16V_CAP 0603/1608"
C11: library part 929, Dielectric=Ceramic, Manufacturer_id=1, Package="CAP 0603/1608", Voltage_Rating=50V, Created_By="Nick Mah", Created_Date=10/20/2018, Drawer_id=1, idCapacitor=929, Name="Cap_4700pf_50V_CAP 0603/1608"
C12: library part 943, Dielectric=Ceramic, Manufacturer_id=1, Package="CAP 0603/1608", Voltage_Rating=50V, Created_By="Nick Mah", Created_Date=10/20/2018, Drawer_id=1, idCapacitor=943, Name="Cap_0.10uf_50V_CAP 0603/1608"
C23: library part 529, Dielectric=Ceramic, Manufacturer_id=1, Package="CAP 0603/1608", Voltage_Rating=25V, Created_By="Nick Mah", Created_Date=10/20/2018, Drawer_id=1, idCapacitor=529, Name="Cap_100pf_25V_CAP 0603/1608"
D1: library part 10, "Zener Diode 14V 500mW ±5% Surface Mount SOD-123", Manufacturer_id=8, Package=SOD-123, Power=500mW, Supplier1PartNo=DDZ9701-7DICT-ND, ComponentLink1Description=Datasheet, ComponentLink1URL=https://www.diodes.com/assets/Datasheets/ds30410.pdf, Drawer_id=1, idDiode=10, Link=https://www.digikey.com/product-detail/en/diodes-incorporated/DDZ9701-7/DDZ9701-7DICT-ND/3877402, MfrPartNo=DDZ9701-7, Name=DDZ9701, Num_Circuits=1, Supplier1=Digi-Key, Type=Zener
D2: library part 12, "DIODE SCHOTTKY 30V 5A TMINIP2", Manufacturer_id=1, MfrPartNo=DB2431200L, Package=SOD-128, Power=30V, Supplier1PartNo=DB2431200LCT-ND, ComponentLink1Description=Datasheet, ComponentLink1URL=https://industrial.panasonic.com/content/data/SC/ds/ds4/DB2431200L_E.pdf, Drawer_id=1, Ic=5A, idDiode=12, Link=https://www.digikey.com/product-detail/en/panasonic-electronic-components/DB2431200L/DB2431200LCT-ND/3884430, Name=DB2431200L, Num_Circuits=1, Supplier1=Digi-Key, Type=Schottky
D3: library part 7, "ESD Protection Diode", Manufacturer_id=1, Package=SOT-23, Power=350W, Supplier1PartNo=NUP1105LT1GOSCT-ND, ComponentLink1URL=https://www.digikey.com/product-detail/en/on-semiconductor/NUP1105LT1G/NUP1105LT1GOSCT-ND/2122067, Drawer_id=1, Ic=8A, idDiode=7, Link=https://www.digikey.com/product-detail/en/on-semiconductor/NUP1105LT1G/NUP1105LT1GOSCT-ND/2122067, MfrPartNo=NUP1105LT1G, Name=SOT-23_350W_Zener, Num_Circuits=1, Supplier1=Digikey, Type=Zener
D4 POWER1: library part 2, Manufacturer_id=1, Package=0805, Brightness=7mcd, Drawer_id=1, Id=20mA, idLED=2, Link=https://www.digikey.com/product-detail/en/visual-communications-company-vcc/CMD17-21VGD-TR8/L62505CT-ND/254936, Name=CMD17_0805_GREEN, Vf=2.1V
D5: library part 1, Package=0805, Drawer_id=1, idLED=1, Manufacturer_id=1, Name=LED_0805_RED, Vf=0.7V
F1: library part 8, "Fuse", Manufacturer_id=1, MfrPartNo=1206L110/12SLYR, Drawer_id=1, I_hold=1.1A, I_max=50A, I_trip=2.2A, idFuse=8, LatestRevisionDate=17-Jul-2002, LatestRevisionNote="Re-released for DXP Platform.", Link=https://www.digikey.com/product-detail/en/littelfuse-inc/1206L110-12SLYR/F5764CT-ND/3593809, Name=Resettable, PackageDescription="Thru-Hole; 2 Leads", PackageReference=PIN-W2/E2.8, Pd_Typ=.8W, Published=8-Jun-2000, Publisher="Altium Limited", V_max=12V
J1: library part 5, "USB Micro Type B", Manufacturer_id=1, ComponentLink1Description=Datasheet, Created_By=Aiku, Created_Date=10/20/2018, Drawer_id=1, idConn=5, Link=https://www.mouser.com/ProductDetail/TE-Connectivity-AMP/1981568-1?qs=sGAEpiMZZMulM8LPOQ%252bykzEIUPbUCiSfqsfxH3Oq%252bYo%3d, MfrPartNo=1981568-1, Name="TE USB Micro", Num_Contacts=5, Supplier1=TE
OVP_G1 PWR_IN1 PWR_OUT1 TEST_CANN1 TEST_CANP1 TEST_CANRX1 TEST_CANTX1 TEST_USBD_N1 TEST_USBD_P1 UART_RX1 UART_TX1: library part 5, Manufacturer_id=1, Package=0603, ComponentLink1Description=Datasheet, ComponentLink1URL=https://www.te.com/commerce/DocumentDelivery/DDEController?Action=srchrtrv&DocNm=1773266&DocType=DS&DocLang=English, Drawer_id=1, idTable=5, Link=https://www.digikey.com/product-detail/en/te-connectivity-amp-connectors/RCU-0C/A106145CT-ND/3477802, MfrPartNo=RCU-0C, Name=RCU-0C_Test_Point
P1: library part 4, "2 row connector", Manufacturer_id=1, Voltage_Rating=None, ComponentLink1Description=Datasheet, Created_By=Aiku, Drawer_id=1, idConn=4, Link=https://www.digikey.com/product-detail/en/5103309-1/A33160-ND/1114898?utm_campaign=buynow&WT.z_cid=ref_octopart_dkc_buynow&utm_medium=aggregator&curr=usd&site=us&utm_source=octopart, MfrPartNo=5103309-1, Name=CONN_TE_2X5POS, Num_Contacts=10, Num_Rows=2, Pitch=2.54mm
R1: library part 328, Manufacturer_id=1, Package=0603, Power=1/10W, Tolerance=1%, ComponentLink1Description=Datasheet, Created_By="Nick Mah", Created_Date=2018-10-20, Drawer_id=1, idResistor=328, Name=Res_43k_0603_1/10W_1%, Supplier 1=Digi-Key
R2: library part 317, Manufacturer_id=1, Package=0603, Power=1/10W, Tolerance=1%, ComponentLink1Description=Datasheet, Created_By="Nick Mah", Created_Date=2018-10-20, Drawer_id=1, idResistor=317, Name=Res_15k_0603_1/10W_1%, Supplier 1=Digi-Key
R3 R6 R7 R8 R9 R10 R11 R12 R13 R14 R19 R20 R25 R26 R27 R28 R29 R30 R31 R32 R33 R34 R35 R36 R37 R38 R39 R40 R41 R42 R43 R44 R45 R46 R47 R48 R49 R50 R51 R52 R53 R54 R55 R56 R57 R58: library part 1369, Manufacturer_id=1, Package=0603, Power=1/10W, Tolerance=5%, ComponentLink1Description=Datasheet, Created_By="Nick Mah", Created_Date=2018-10-20, Drawer_id=1, idResistor=1369, Name=Res_1.0k_0603_1/10W_5%, Supplier 1=Digi-Key
R4: library part 497, Manufacturer_id=1, Package=0805, Power=1/10W, Tolerance=1%, ComponentLink1Description=Datasheet, Created_By="Nick Mah", Created_Date=2018-10-20, Drawer_id=1, idResistor=497, Name=Res_470_0805_1/10W_1%, Supplier 1=Digi-Key
R4: library part 313, Manufacturer_id=1, Package=0603, Power=1/10W, Tolerance=1%, ComponentLink1Description=Datasheet, Created_By="Nick Mah", Created_Date=2018-10-20, Drawer_id=1, idResistor=313, Name=Res_10k_0603_1/10W_1%, Supplier 1=Digi-Key
R5: library part 545, Manufacturer_id=1, Package=0805, Power=1/10W, Tolerance=1%, ComponentLink1Description=Datasheet, Created_By="Nick Mah", Created_Date=2018-10-20, Drawer_id=1, idResistor=545, Name=Res_47k_0805_1/10W_1%, Supplier 1=Digi-Key
R5: library part 1393, Manufacturer_id=1, Package=0603, Power=1/10W, Tolerance=5%, ComponentLink1Description=Datasheet, Created_By="Nick Mah", Created_Date=2018-10-20, Drawer_id=1, idResistor=1393, Name=Res_10k_0603_1/10W_5%, Supplier 1=Digi-Key
R15: library part 289, Manufacturer_id=1, Package=0603, Power=1/10W, Tolerance=1%, ComponentLink1Description=Datasheet, Created_By="Nick Mah", Created_Date=2018-10-20, Drawer_id=1, idResistor=289, Name=Res_1.0k_0603_1/10W_1%, Supplier 1=Digi-Key
R16 R17: library part 1340, Manufacturer_id=1, Package=0603, Power=1/10W, Tolerance=5%, ComponentLink1Description=Datasheet, Created_By="Nick Mah", Created_Date=2018-10-20, Drawer_id=1, idResistor=1340, Name=Res_62_0603_1/10W_5%, Supplier 1=Digi-Key
R21 R22 R23 R24: library part 721, Manufacturer_id=1, Package=0805, Power=1/4W, Tolerance=1%, ComponentLink1Description=Datasheet, Created_By="Nick Mah", Created_Date=2018-10-20, Drawer_id=1, idResistor=721, Name=Res_1.0k_0805_1/4W_1%, Supplier 1=Digi-Key
Sensor1 Sensor2 Sensor3 Sensor4 Sensor5 Sensor6 Sensor7 Sensor8 Sensor9 Sensor10 Sensor11 Sensor12 Sensor13 Sensor14 Sensor15 Sensor16 Sensor17 Sensor18 Sensor19 Sensor20: library part 27, "RSCMJJM005NDSE3 Pressure Sensor", Manufacturer_id=1, Drawer_id=1, idIC_Misc=27, Link=https://sensing.honeywell.com/RSCMJJM005NDSE3-amplified-board-mount-pressure-sensors, Name="RSCMJJM005NDSE3 Pressure Sensor", Vin(Max)=3.3, Vin(Min)=2.7
T1: library part 6, "MOSFET N-CHANNEL 30V 5A SOT23", Manufacturer_id=1, Package=SOT-23, Created_By=Angel, Drawer_id=1, Id=2.8A, idFETs=6, Link=https://www.digikey.com/product-detail/en/diodes-incorporated/DMG2302UK-7/DMG2302UK-7DICT-ND/6010163, MfrPartNo=DMG2302UK-7, Name=DMG2302UK-7, Num_Circuits=1, Rds_On=90mOhm, Supplier1=Digi-Key, Vdss=20V, Vgs(Max)=1V, Vgs(typ)=800mV
U1: library part 4, Manufacturer_id=1, MfrPartNo=LP5907MFX-3.3/NOPB, Package=SOT23-5, Drawer_id=1, idPMIC_Lin=4, Link=https://www.digikey.com/product-detail/en/texas-instruments/LP5907MFX-3.3-NOPB/296-38557-2-ND/3906441, Name="LP5907 LDO", Vin(Max)=6V, Vout(Min)=3.3V
U2: library part 1, Drawer_id=1, idMCU=1, Manufacturer_id=1, Name="MKE18F512VLH16 MCU"
U3: library part 7, Current_Rating=1A, Manufacturer_id=1, MfrPartNo=REG104GA-A, Package=SOT-223-6, Drawer_id=1, idPMIC_Lin=7, Link=https://www.digikey.com/product-detail/en/texas-instruments/REG104GA-A/REG104GA-A-ND/380288?utm_adgroup=Integrated%20Circuits&slid=&gclid=CjwKCAjwpKveBRAwEiwAo4Pqm3P1cbCGhU8VzQ4hsaig_pQLQzWQ1vPK7ianKpgKPxk_g8_0T-ULMBoCGh8QAvD_BwE, Name="5V 1A LDO", Num_Outputs=1, Vin(Max)=16V, Vin(Min)=-.3V, Vout(Max)=5V, Vout(Min)=2.5V
U4: library part 9, "1/1 Transceiver Half CANbus 8-SOIC", Manufacturer_id=1, MfrPartNo=SN65HVD233D, Package=SOIC-8, Supplier1PartNo=296-14639-5-ND, Data_Rate=1Mbps, Drawer_id=1, idIC_Interface=9, Link=https://www.digikey.com/products/en?mpart=SN65HVD233D&v=296, Name="CAN Transceiver", Num_Circuits=1, Protocol=CAN, Supplier1=digikey, Type=Transceiver, Vin(Max)=3.6V, Vin(Min)=3V
U6: library part 3, Manufacturer_id=1, Created_By=Kyle, Drawer_id=1, idIC_Interface=3, Link=https://www.digikey.com/product-detail/en/ftdi-future-technology-devices-international-ltd/FT232RL-REEL/768-1007-1-ND/1836402, MfrPartNo=FT232RL, Name="USB FTDI", Protocol=UART, Vin(Max)=5.25, Vin(Min)=3.3
U7 U8: library part 32, "Logic Level Shifter driven by Vcc", Manufacturer_id=1, MfrPartNo=SN74LV1T34DBVR, Package=SOT23-5, Supplier1PartNo=296-37176-1-ND, ComponentLink1Description=Null, ComponentLink1URL=Null, Data_Rate=Null, Drawer_id=1, idIC_Misc=32, Link=https://www.digikey.com/product-detail/en/texas-instruments/SN74LV1T34DBVR/296-37176-1-ND/4555593, Name="Level Shifter", Num_Circuits=1, Protocol=Null, Supplier1=DigiKey, Type=N/A, Vin(Max)="Vcc + .5V", Vin(Min)=0V
X1: library part 15, "2 row 4 pin Board", Manufacturer_id=1, ComponentLink1Description=Datasheet, Created_By=Angel, Drawer_id=1, idConn=15, Link=https://www.te.com/usa-en/product-DTF13-4P.html, MfrPartNo=DTF13-4P, Name=DTF13-4P, Num_Contacts=4, Supplier1=TE

## Free pads (board coordinates)
  rect 60x60 hole 196.85: 4(9357,4113) 5(9357,3017) 7(1250,2868) 8(1248,4311)
  round 250 hole 75: 9(9357,4113) 10(1248,4311) 10(1250,2868) 10(9357,3017)

## Via types
v1: diameter 30, hole 15, Top Layer to Bottom Layer, 254 vias
v2: diameter 50, hole 28, Top Layer to Bottom Layer, 1 vias

## Nets (pads, with @x,y where several pads share a name; then routed paths per layer and width w, separated by ;. In a path a pad name is that pad's centre, name@x,y a point inside that pad or via, vN(x,y) a via of type N, cw(c..) or ccw(c..) an arc to the next point about the centre after c; other vN are vias at no path point)
3.3V: C3.2 C7.2 C8.2 C9.2 C10.2 C12.1 C13.2 C14.2 C15.2 C16.2 C20.2 C21.2 C22.2 C25.2 C26.2 C27.2 C28.2 C29.2 C30.2 C31.2 C32.2 C33.2 C34.2 C35.2 C36.2 C37.2 C38.2 C39.2 C40.2 C41.2 C42.2 C43.2 C44.2 C45.2 C46.2 C47.2 C48.2 C49.2 C50.2 C51.2 C52.2 C53.2 R3.2 R6.2 R7.2 R8.2 R9.2 R10.2 R11.2 R12.2 R13.2 R14.2 R19.2 R20.2 R25.2 R26.2 R27.2 R28.2 R29.2 R30.2 R31.2 R32.2 R33.2 R34.2 R35.2 R36.2 R37.2 R38.2 R39.2 R40.2 R41.2 R42.2 R43.2 R44.2 R45.2 R46.2 R47.2 R48.2 R49.2 R50.2 R51.2 R52.2 R53.2 R54.2 R55.2 R56.2 R57.2 R58.2 Sensor1.6 Sensor2.6 Sensor3.6 Sensor4.6 Sensor5.6 Sensor6.6 Sensor7.6 Sensor8.6 Sensor9.6 Sensor10.6 Sensor11.6 Sensor12.6 Sensor13.6 Sensor14.6 Sensor15.6 Sensor16.6 Sensor17.6 Sensor18.6 Sensor19.6 Sensor20.6 U1.5 U4.3 U8.5 | length 30506.3
  Top Layer w10: Sensor20.6@1275.92,2464 1276.92,2465 1372,2465 1373,2464 1374,2464 1409.5,2428.5 2074.5,2428.5 2110,2464 Sensor19.6@2127.5,2464 v1(2211,2464) 2246.5,2428.5 2932.92,2428.5 2968.42,2464 Sensor18.6@2985.92,2464 2994.92,2455 v1(3070,2455) 3096.5,2428.5 3515.59,2428.5 3533.59,2446.5 3828.42,2446.5 Sensor17.6@3845.92,2464 v1(3928,2464) 3963.5,2428.5 4625.92,2428.5 4707.42,2510 Sensor16.6@4724.92,2510 Sensor16.6@4742.42,2510 ; v1(1645.57,4669.57) 1650.99,4669.57 1656.91,4675.5 1701.5,4675.5 Sensor10.6@1719,4693 1736.5,4693 1772,4657.5 2433.5,4657.5 v1(2466,4690) 2571,4690 Sensor9.6@2574,4693 2591.5,4693 2609,4675.5 2609,4666.26 2627.42,4647.84 3300.84,4647.84 v1(3340,4687) 3418,4687 Sensor8.6@3424,4693 3441.5,4693 3477,4657.5 4152.5,4657.5 v1(4188,4693) Sensor7.6@4274,4693 4291.5,4693 4327,4657.5 5000.5,4657.5 v1(5036,4693) Sensor6.6@5124,4693 5141.5,4693 5177,4657.5 5855.5,4657.5 v1(5891,4693) Sensor5.6@5974,4693 5991.5,4693 6027,4657.5 6699.5,4657.5 v1(6735,4693) Sensor4.6@6824,4693 6841.5,4693 6877,4657.5 7558.5,4657.5 v1(7593,4692) 7672.53,4692 Sensor3.6@7673.53,4693 7691.03,4693 7726.53,4657.5 8399.5,4657.5 v1(8433,4691) 8522,4691 Sensor2.6@8524,4693 8541.5,4693 8577,4657.5 9251.5,4657.5 v1(9280,4686) 9367,4686 Sensor1.6@9374,4693 ; v1(2640,3965) 2640,3933.55 2721.55,3852 U4.3@2738.28,3852 2936.43,3852 C12.1@2937,3852.57 2949.72,3839.86 3130.71,3839.86 3383.04,3587.53 3465.08,3587.53 3547.03,3505.57 C3.2@3549,3505.57 3540.83,3497.4 U1.5@3428.13,3497.4 3420.26,3497.4 3413.45,3490.59 3413.45,3457.79 3361,3405.35 v1(3361,3201) ; v1(3350,2663) 3357,2670 v1(3357,2992) ; v1(4831,2497) 4818,2510 Sensor16.6@4742.42,2510 ; U8.5@6379.87,3029.6 6379.87,2899.13 v1(6425,2854) ; v1(9056,2469) Sensor12.6@8976,2469 8958.5,2469 8918,2428.5 8247.5,2428.5 v1(8212,2464) Sensor11.6@8126,2464 8108.5,2464 8073,2428.5 7395.5,2428.5 v1(7360,2464) Sensor13.6@7269.6,2464 7252.1,2464 7216.6,2428.5 6535.5,2428.5 v1(6500,2464) Sensor14.6@6410.92,2464 6393.42,2464 6357.92,2428.5 5677.5,2428.5 v1(5642,2464) Sensor15.6@5555.92,2464 5538.42,2446.5 5390.65,2446.5 5372.65,2428.5 5242.38,2428.5 5225.38,2445.5 4806.92,2445.5 Sensor16.6@4742.42,2510
  Bottom Layer w10: R57.2@1443,4809.41 1447.98,4804.43 C53.2@1574,4804.43 1575.97,4804.43 1645.57,4734.82 v1(1645.57,4669.57) C52.2@1566,4669.57 1468.98,4669.57 R58.2@1460,4660.59 ; R39.2@1569,2501.41 C35.2@1468,2501.43 1409.43,2501.43 v1(1373,2465) 1373,2449.57 C34.2@1460,2362.57 1600.98,2362.57 R40.2@1602,2363.59 ; R56.2@2299,4634.59 2302.98,4638.57 C50.2@2403,4638.57 2404.97,4638.57 2452.57,4686.17 2462.17,4686.17 v1(2466,4690) ; R54.2@2302,4775.41 2305.02,4778.43 C51.2@2431,4778.43 2432.97,4778.43 2466,4745.39 v1(2466,4690) ; R35.2@2425,2510.41 2420.98,2514.43 C31.2@2320,2514.43 2261.43,2514.43 v1(2211,2464) 2211,2461 2292.43,2379.57 C30.2@2366,2379.57 2453.02,2379.57 R36.2@2477,2355.59 ; v1(2640,3965) 2466,4139 v1(2466,4690) ; R55.2@3121,4650.59 C48.2@3270,4650.57 3303.57,4650.57 v1(3340,4687) 3340,4702.43 3270.99,4771.43 3269.99,4771.44 3137.02,4772.43 R53.2@3134,4769.41 ; R37.2@3350,2358.59 3343.02,2365.57 C33.2@3261,2365.57 3248.28,2378.29 3146.71,2378.29 v1(3070,2455) 3110.13,2495.13 3152.28,2495.13 C32.2@3165,2507.85 3279.44,2507.85 R38.2@3283,2511.41 3294.73,2523.14 3352.39,2523.14 3379.41,2550.16 3379.41,2633.59 v1(3350,2663) ; v1(3357,2992) 3361,2996 v1(3361,3201) ; R50.2@3981,4784.41 3984.98,4780.43 C46.2@4105,4780.43 4188,4697.43 v1(4188,4693) 4148.57,4653.57 C47.2@4107,4653.57 3992.98,4653.57 R52.2@3987,4647.59 ; R31.2@4150,2510.41 4145.02,2505.43 C26.2@4053,2505.43 3969.43,2505.43 v1(3928,2464) 4021.43,2370.57 C27.2@4087,2370.57 4200.02,2370.57 R32.2@4202,2368.59 ; R49.2@4820,4787.41 4821.98,4785.43 C45.2@4951,4785.43 5036,4700.43 v1(5036,4693) 4993.57,4650.57 C44.2@4957,4650.57 R51.2@4835,4650.59 ; R34.2@5012,2511.41 5009.02,2508.43 C29.2@4917,2508.43 4842.43,2508.43 v1(4831,2497) 4831,2419 4880.43,2369.57 C28.2@4946,2369.57 5060.02,2369.57 R33.2@5061,2368.59 ; R47.2@5675,4792.41 5676.61,4794.02 C43.2@5813,4794.02 5891,4716.02 v1(5891,4693) 5844.57,4646.57 C42.2@5823,4646.57 5687.57,4646.57 R48.2@5687,4646 ; R27.2@5875,2503.41 5873.98,2504.43 C20.2@5771,2504.43 5770,2505.43 5683.43,2505.43 v1(5642,2464) 5736.43,2369.57 C21.2@5787,2369.57 5901.02,2369.57 R28.2@5906,2364.59 ; v1(6425,2854) 6500,2779 v1(6500,2464) ; R45.2@6522,4787.41 6524.98,4784.43 C40.2@6645,4784.43 6735,4694.43 v1(6735,4693) 6691.57,4649.57 C41.2@6666,4649.57 6545.57,4649.57 R46.2@6545,4649 ; R30.2@6685,2508.41 6683.02,2506.43 C25.2@6585,2506.43 6542.43,2506.43 v1(6500,2464) ; R29.2@6752,2367.59 6751.02,2368.57 C22.2@6618,2368.57 6595.43,2368.57 v1(6500,2464) ; R43.2@7381,4790.41 7381.41,4790 C39.2@7533,4790 7593,4730 v1(7593,4692) 7552,4651 C38.2@7501,4651 7395.41,4651 R44.2@7391,4646.59 ; R25.2@7569,2510.41 7568.02,2509.43 C15.2@7466,2509.43 7405.43,2509.43 v1(7360,2464) 7456.43,2367.57 C16.2@7473,2367.57 7608.02,2367.57 R26.2@7610,2365.59 ; R41.2@8218,4797.41 8228.98,4786.43 C36.2@8357,4786.43 8433,4710.43 v1(8433,4691) 8391,4649 C37.2@8354,4649 8242.41,4649 R42.2@8240,4646.59 ; R20.2@8401,2512.41 8301.98,2512.41 C14.2@8297,2507.43 8255.43,2507.43 v1(8212,2464) 8299.43,2376.57 C13.2@8331,2376.57 8486.98,2376.57 R19.2@8489,2378.59 ; R8.2@9045,4735.41 R8.2@9055.41,4735.41 ; R9.2@9079,4645.18 9079.39,4645.57 C8.2@9198,4645.57 9239.57,4645.57 v1(9280,4686) 9280,4690.43 C7.2@9238,4732.43 9141.98,4732.43 R3.2@9139,4735.41 R8.2@9055.41,4735.41 ; R13.2@9153,2261.59 9251.59,2261.59 R10.2@9261,2271 9267.3,2277.3 9267.3,2375.53 9284.63,2392.86 9285.3,2392.86 9291.36,2398.92 R11.2@9291.36,2399.59 ; R14.2@9209,2399.59 C9.2@9129,2399.57 9127.03,2399.57 9057.61,2469 v1(9056,2469) 9087.71,2500.71 9143.28,2500.71 C10.2@9156,2513.43 9250.02,2513.43 R12.2@9256,2519.41 ; R14.2@9209,2399.59 R11.2@9291.36,2399.59 ; R6.2@9233,4870.41 9230,4867.41 R7.2@9102,4867.41 9095,4860.41 9095,4775 R8.2@9055.41,4735.41 ; R11.2@9299,2404.59 9296.36,2404.59 R11.2@9291.36,2399.59
12V: F1.2 PWR_IN1.1 X1.1 | length 1126.1
  Top Layer w10: PWR_IN1.1@1732.2,3384.39 PWR_IN1.1@1740.6,3376
  Top Layer w25: X1.1@1463.91,3376 PWR_IN1.1@1724.57,3376 ; PWR_IN1.1@1758.32,3376 1867.91,3485.59 2303.46,3485.59 2432.57,3356.48 F1.2@2432.57,3332.8
  Top Layer w30: X1.1@1455.52,3384.39 X1.1@1463.91,3376 ; PWR_IN1.1@1724.57,3376 PWR_IN1.1@1732.2,3383.64 ; PWR_IN1.1@1740.6,3376 PWR_IN1.1@1758.32,3376 ; F1.2@2432.57,3332.8 2437.25,3328.12 F1.2@2447,3328.12